# Altium PCB LIS2DE12TR.PcbDoc
Units mm, origin at the board's own origin, x right, y up, seen from the top; angles counter-clockwise.
Board outline 127 x 101.6 mm, 2 copper layers (Top Layer, Bottom Layer); 6 components, 9 nets, 27 pads, 0 vias.
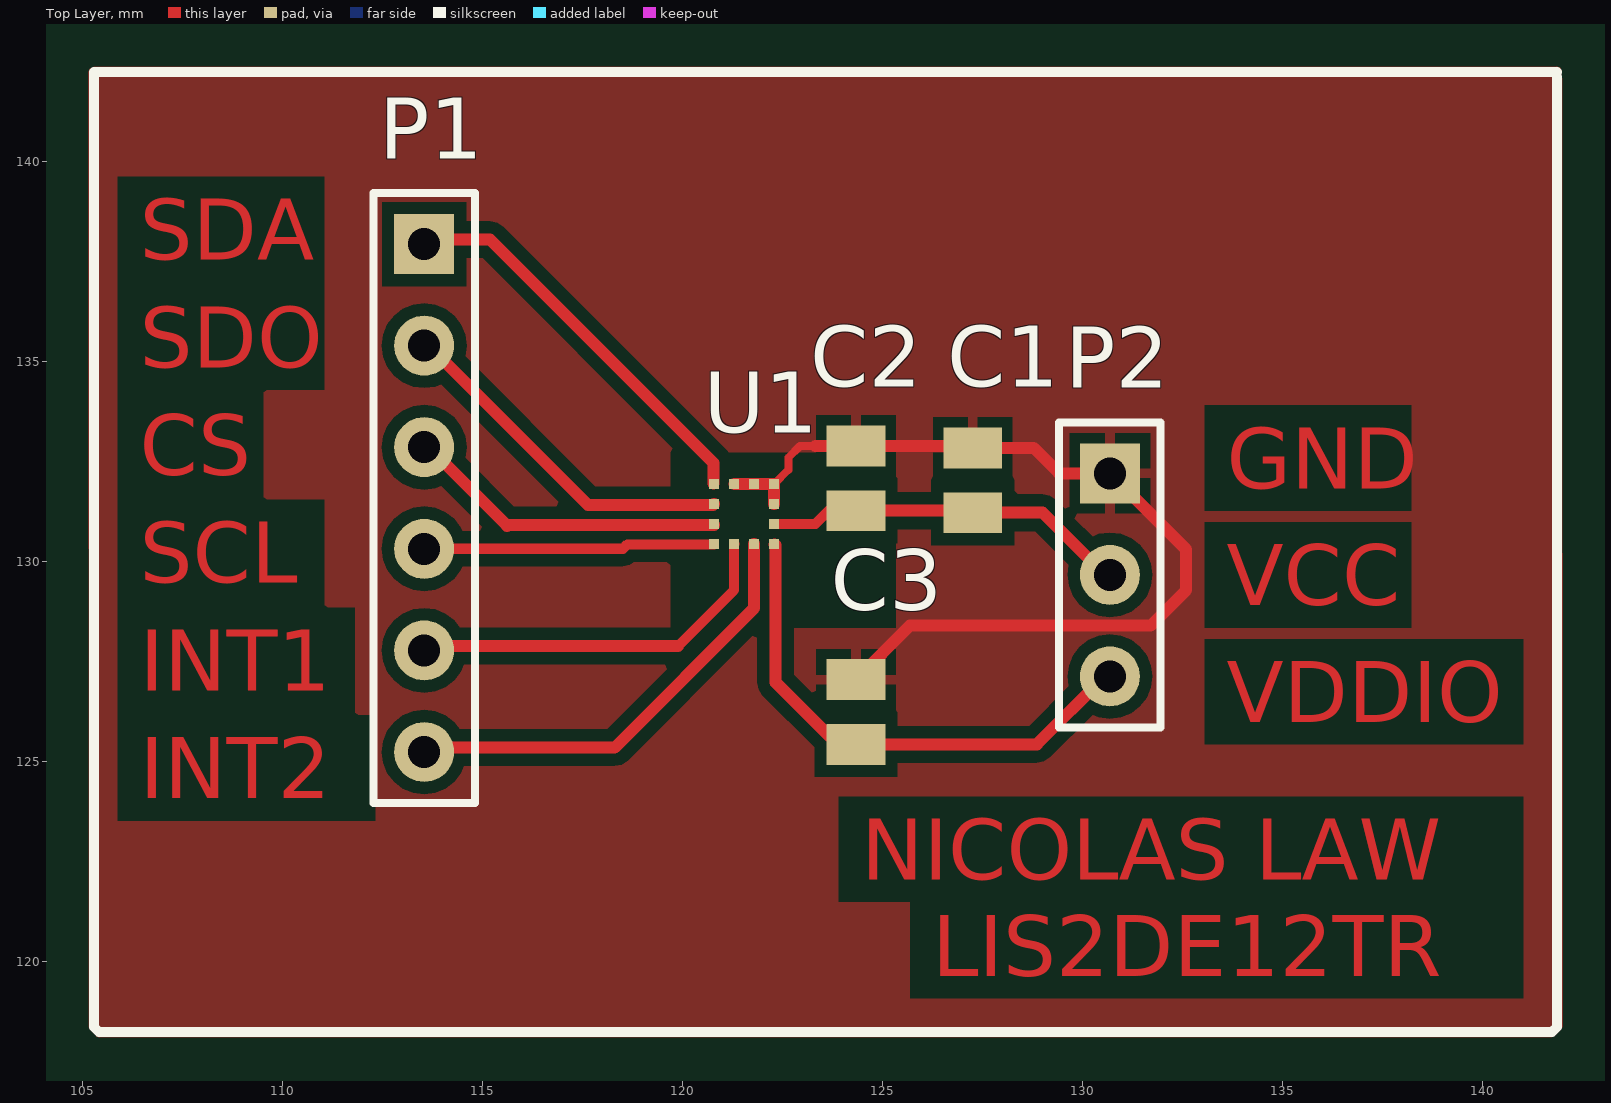
[diagram p0: Top Layer view]
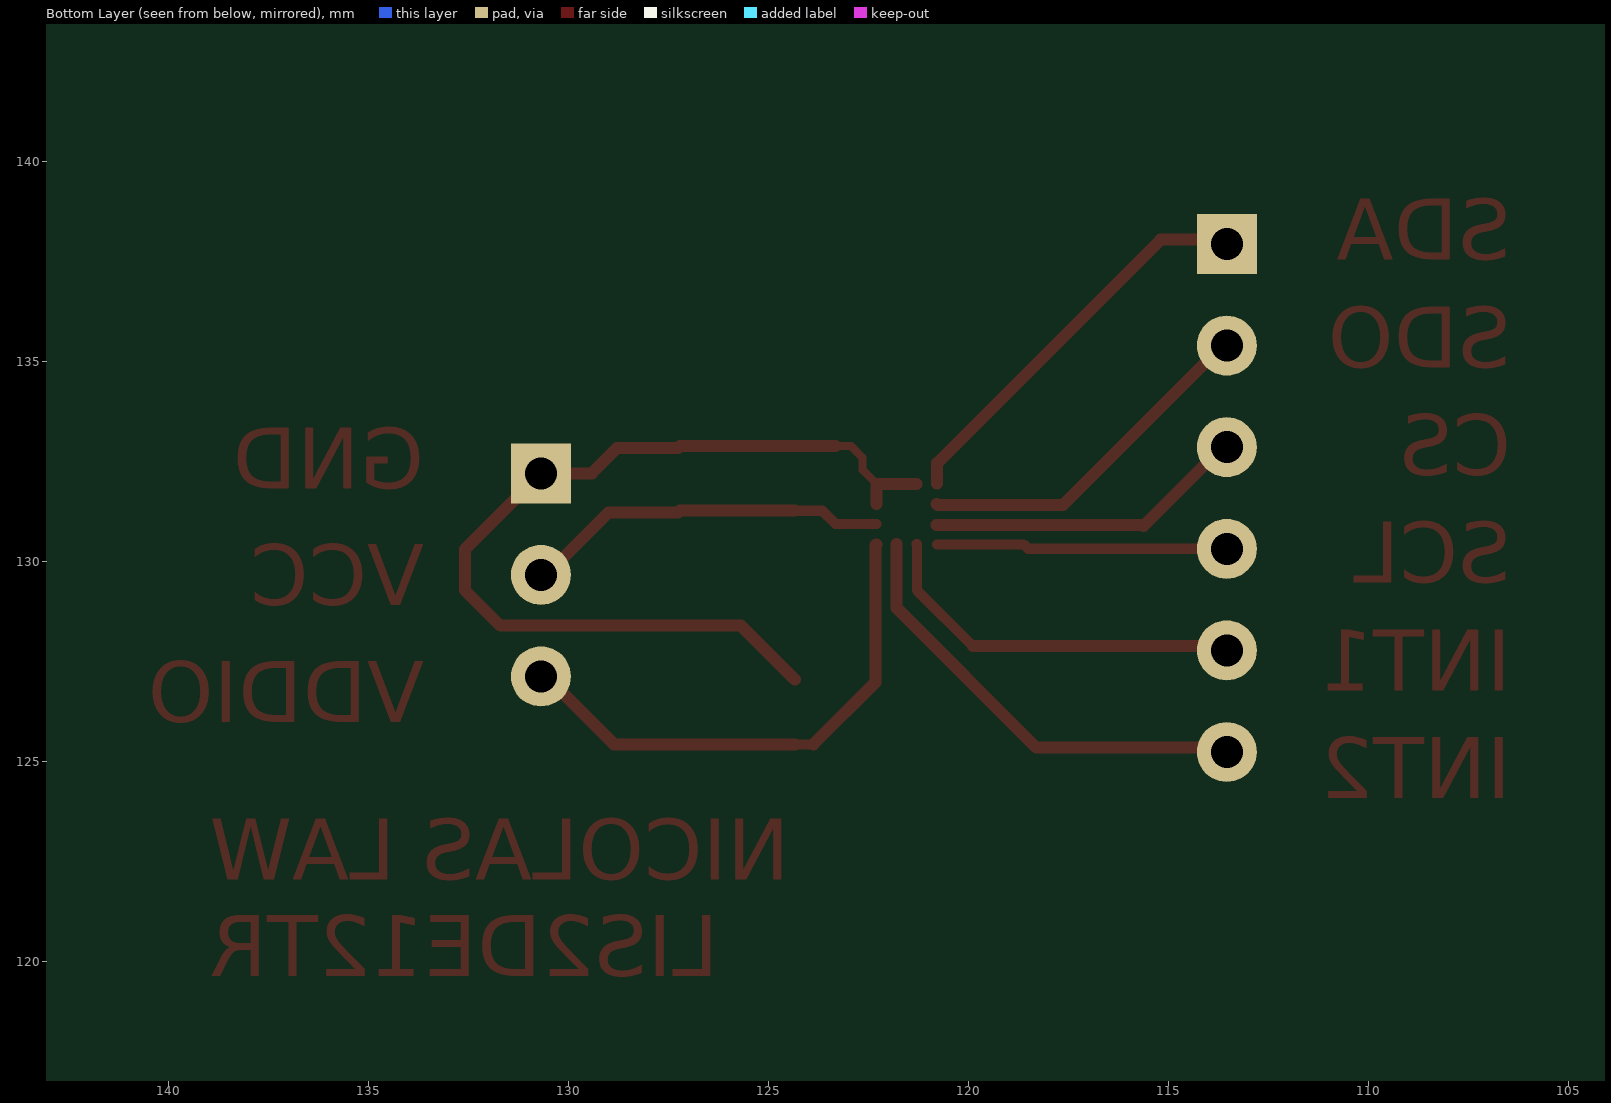
[diagram p1: Bottom Layer view, seen from below]

## Layer stack, top to bottom
Top Solder: solder mask 0.0102, Solder Resist, Dk 3.5
Top Layer: signal copper 0.0356
Dielectric 1: dielectric 0.32, FR-4, Dk 4.8
Bottom Layer: signal copper 0.0356
Bottom Solder: solder mask 0.0102, Solder Resist, Dk 3.5

## Board outline
50.8,76.2 177.8,76.2 177.8,177.8 50.8,177.8

## Design rules (kind name [scope] priority, off if disabled: settings)
Clearance Clearance_1 [All] p1: gap=0.25
Clearance Clearance_plan [InPolygon] p2: gap=0.25
PolygonConnect [All] p1: connectstyle=Relief reliefconductorwidth=0.254 reliefentries=4 polygonreliefangle="90 Angle" airgapwidth=0.254
RoutingVias [All] p1: holewidth=0.6 width=1 viastyle="Through Hole" minholewidth=0.711 minwidth=1.27 maxholewidth=0.711 maxwidth=1.27
SolderMaskExpansion [All] p1: expansion=0.102
UnpouredPolygon [All] p1: allowunpoured=FALSE
Width [All] p1: maxlimit=2.54 minlimit=0.2 preferedwidth=0.3 minimp=50.000000 maximp=50.000000 favimp=50.000000
29 further rules are at their usual default settings.

## Components (designator, comment, footprint, x,y, rotation, side; value= is the part's Value field where it differs from the comment)
C1 "Cap" capacitor_10uf 127.254,132.032 r270 top
C2 "Cap" capacitor_10uf 124.333,132.08 r270 top
C3 "Cap" capacitor_10uf 124.333,126.238 r270 top
P1 "Header 6" HDR1X6 113.538,137.939 r270 top
P2 "Header 3" HDR1X3 130.683,132.207 r270 top
U1 "LIS2DE12TR" LIS2DE12TR 121.539,131.191 r180 top

## Footprints (in the part's own frame and the unit in brackets; to place one, negate y for a bottom-side part, rotate by r counter-clockwise, add the part's x,y. Pads: shape width x height; smd on the part's side, far side on the other; paste and mask are expansions set on the pad)
capacitor_10uf [mm]
  rect 1.02x1.47 smd: 1(-0.81,0) 2(0.81,0)
HDR1X3 [mm] "Connector; Header; 3 Position"
  rect 1.5x1.5 hole 0.8: 1(0,0)
  round 1.5 hole 0.8: 2(2.54,0) 3(5.08,0)
  silkscreen extent -1.27,-1.27 6.35,1.27
HDR1X6 [mm] "Connector; Header; 6 Position"
  rect 1.5x1.5 hole 0.8: 1(0,0)
  round 1.5 hole 0.8: 2(2.54,0) 3(5.08,0) 4(7.62,0) 5(10.16,0) 6(12.7,0)
  silkscreen extent -1.27,-1.27 13.97,1.27
LIS2DE12TR [mm] "LGA, 12-Leads, Body 2,00x2,00mmx1,00mm, Pitch 0,50mm"
  rect 0.25x0.25 smd: 1(0.75,0.75) 2(0.75,0.25) 3(0.75,-0.25) 4(0.75,-0.75) 5(0.25,-0.75) 6(-0.25,-0.75) 7(-0.75,-0.75) 8(-0.75,-0.25) 9(-0.75,0.25) 10(-0.75,0.75) 11(-0.25,0.75) 12(0.25,0.75)
  body extent -1,-1 1,1, height 1

## Part data
C1 C2 C3: "Capacitor"
P1: "Header, 6-Pin"
P2: "Header, 3-Pin"

## Nets (pads, with @x,y where several pads share a name; then routed paths per layer and width w, separated by ;. In a path a pad name is that pad's centre, name@x,y a point inside that pad or via, vN(x,y) a via of type N, cw(c..) or ccw(c..) an arc to the next point about the centre after c; other vN are vias at no path point)
CS: P1.3 U1.2 | length 8.1
  Top Layer w0.3: P1.3@113.538,132.969 115.614,130.893 115.637,130.916 U1.2@120.789,130.916
GND: C1.1 C2.1 C3.1 P2.1 U1.5 U1.6 U1.7 U1.8 | length 23.6
  Top Layer w0.2: U1.7 122.643,132.295 122.643,132.597 122.936,132.89 123.318,132.89
  Top Layer w0.254: C1.1@127.206,132.89 C1.1
  Top Layer w0.3: U1.5@121.297,131.941 U1.6 U1.7 U1.8 ; 123.318,132.89 C2.1 C1.1@127.206,132.89 ; C3.1 125.682,128.397 131.699,128.397 132.588,129.286 132.588,130.302 P2.1 129.413,132.207 128.778,132.842 C1.1
INT1: P1.5 U1.12 | length 9.5
  Top Layer w0.254: 119.888,127.889 121.285,129.286 121.285,130.437 U1.12
  Top Layer w0.3: P1.5@113.538,127.889 119.888,127.889
INT2: P1.6 U1.11 | length 11.3
  Top Layer w0.3: P1.6@113.538,125.349 118.3,125.349 121.789,128.838 U1.11
SCL: P1.4 U1.1 | length 7.3
  Top Layer w0.254: P1.4 118.508,130.319 118.618,130.429 U1.1@120.777,130.429 ; P1.4@113.538,130.429 P1.4@113.574,130.393
SDA: P1.1 U1.4 | length 10.1
  Top Layer w0.3: P1.1@113.538,138.049 115.189,138.049 120.777,132.461 U1.4@120.777,131.953
SDO: P1.2 U1.3 | length 9
  Top Layer w0.3: P1.2@113.538,135.509 117.631,131.416 120.764,131.416 U1.3
VCC: C1.2 C2.2 P2.2 U1.9 | length 9.1
  Top Layer w0.254: U1.9@122.301,130.937 123.317,130.937 123.65,131.27 C2.2 ; C1.2@127.206,131.27 C1.2
  Top Layer w0.3: C2.2 C1.2@127.206,131.27 ; C1.2 129.001,131.222 P2.2@130.556,129.667
VDDIO: C3.2 P2.3 U1.10 | length 13
  Top Layer w0.254: C3.2@123.873,125.428 C3.2
  Top Layer w0.3: U1.10@122.301,130.429 122.321,130.409 122.321,126.98 C3.2@123.873,125.428 ; C3.2 128.857,125.428 P2.3@130.556,127.127

## Polygon pours and split planes (outlines as drawn)
GND on Top Layer "Top Layer-No Net" (solid, remove dead copper, pour order 2): 105.283,118.237 cw(c105.283,118.364) 105.156,118.364 105.156,142.24 cw(c105.283,142.24) 105.283,142.367 141.859,142.367 cw(c141.859,142.24) 141.986,142.24 cw(c141.859,142.24) 141.969,142.177 cw(c141.859,142.113) 141.986,142.113 141.986,118.364 cw(c141.859,118.364) 141.859,118.237 cw(c141.732,118.237) 141.732,118.11 105.41,118.11 cw(c105.41,118.237)

## Other copper
Top Layer:
  pour cut-out: 119.697,132.715 125.322,132.715 125.322,128.342 119.697,128.342
  text "SDA" at 106.426,137.541 h1.52
  text "SDO" at 106.426,134.849 h1.52
  text "CS" at 106.426,132.156 h1.52
  text "GND" at 133.604,131.826 h1.52
  text "SCL" at 106.426,129.464 h1.52
  text "VCC" at 133.604,128.905 h1.52
  text "INT1" at 106.426,126.771 h1.52
  text "VDDIO" at 133.604,125.984 h1.52
  text "INT2" at 106.426,124.079 h1.52
  text "NICOLAS LAW" at 124.463,122.047 h1.52
  text "LIS2DE12TR" at 126.24,119.634 h1.52

## Silkscreen, mask and mechanical layers (free items; w line width, h text height)
Top Overlay:
  lines w0.254: 141.859,142.113 141.859,118.364 141.732,118.237 105.41,118.237 105.283,118.364 105.283,142.24 141.859,142.24